# EAGLE board ESC (EAGLE 9.6.2)
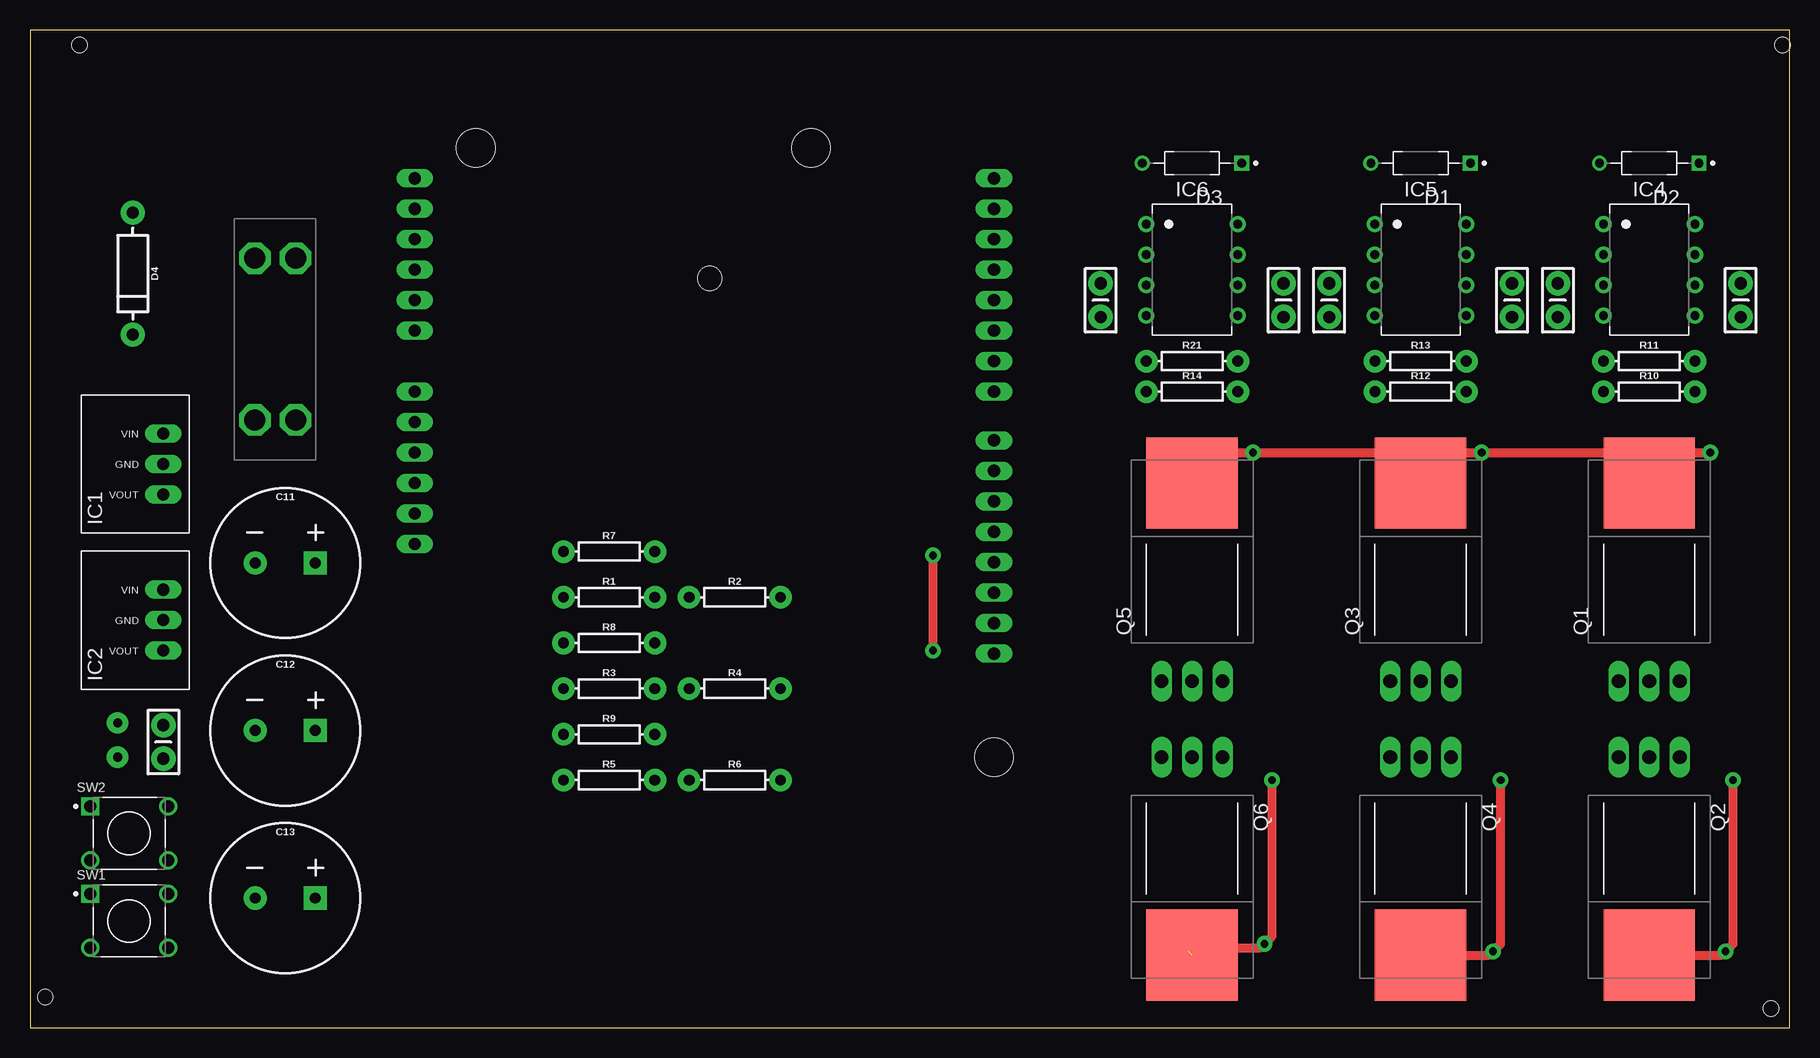
[diagram p0: board, top side]
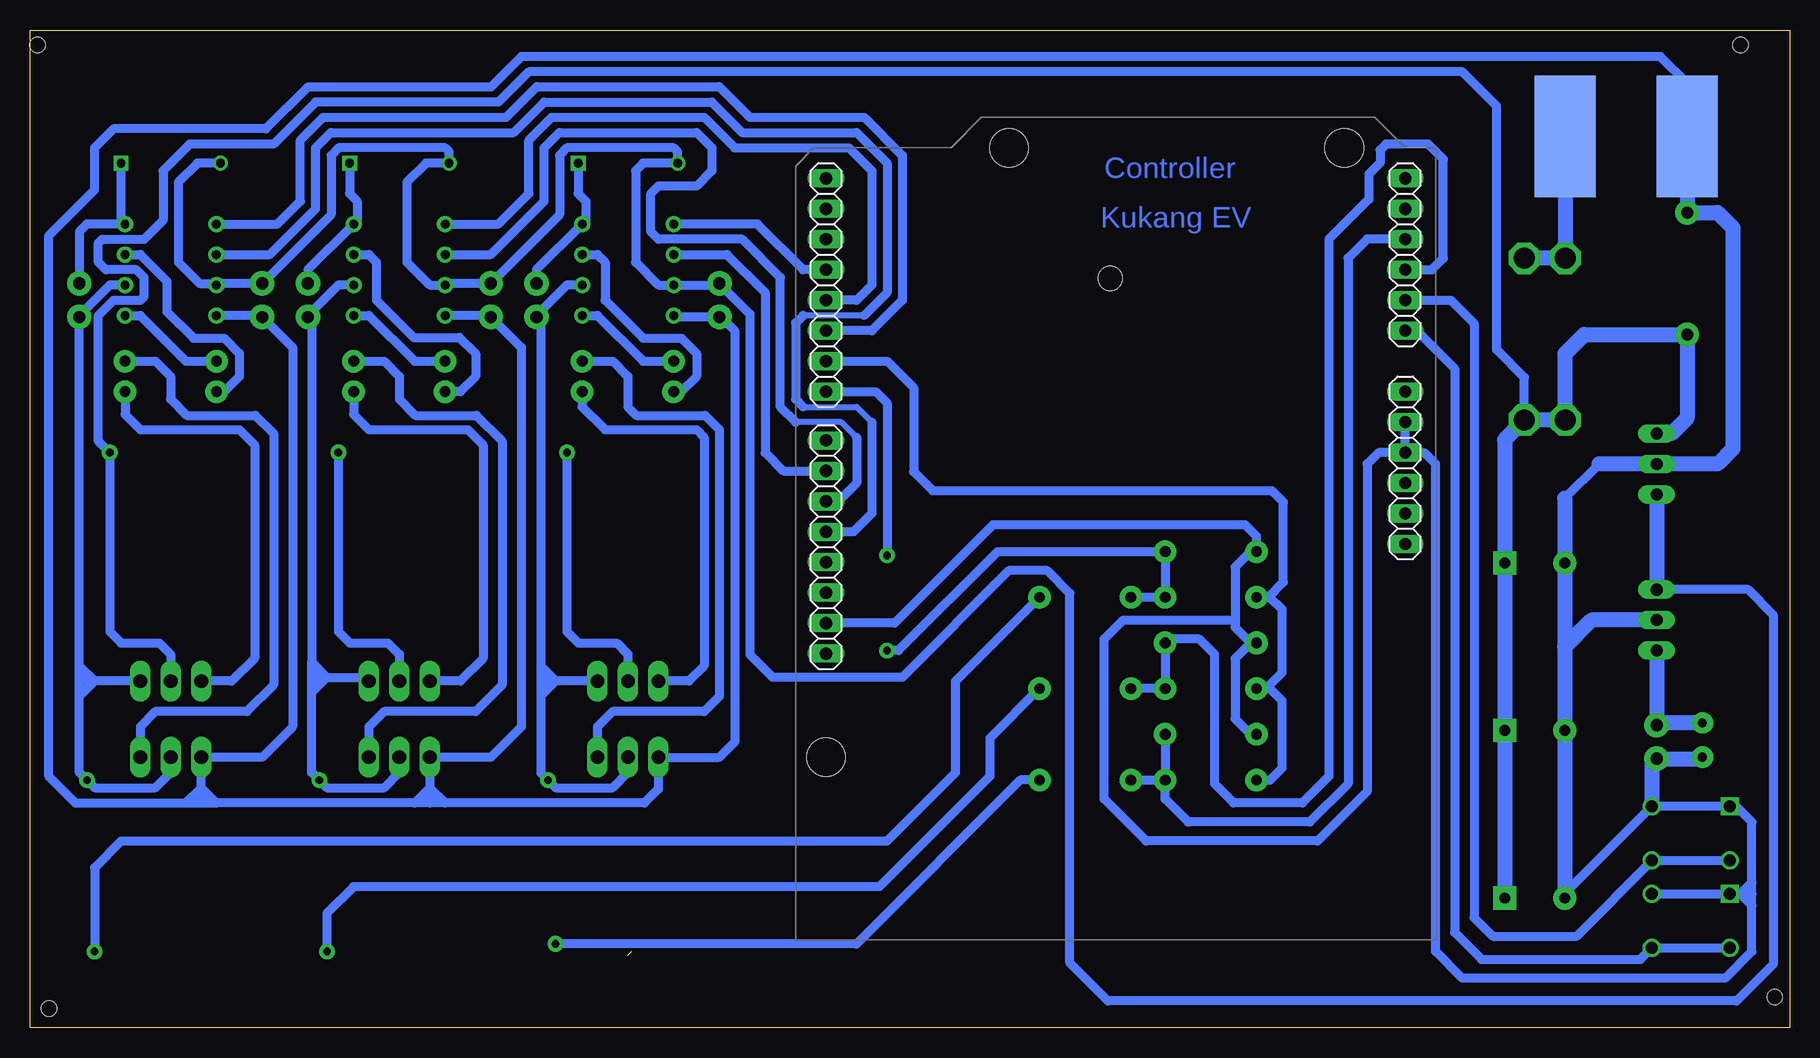
[diagram p1: board, bottom side, seen from below]

Size 146.66 x 83.17 mm. Coordinates in mm from the lower left corner, seen from the top.
Outline: 0,0 146.67,0 146.67,83.17 0,83.17 0,0
Copper layers (1*16): Top 0.035mm / dielectric 1.5mm / Bottom 0.035mm
Design rules "default": minimum track width 6mil, minimum drill 0.35mm, track to track 6mil, track to pad 6mil, pad to pad 6mil, via to via 6mil, smd to smd 6mil, copper to edge 40mil, drill to drill 6mil, minimum pad ring 10mil, minimum via ring 8mil, stop-mask expansion 4mil, vias tented up to drill 0mil, thermal gap 10mil
Holes 1.27 mm at 1.27,2.54 4.13,81.92 145.1,1.59 146.05,81.92

## Footprints (pad centres in the part's own frame; a part is rotated, then mirrored left to right if it is on the bottom)
CAP-PTH-SMALL-KIT = drill 1.016 pad 2.032: 1 -1.397,0; 2 1.397,0
CPOL-RADIAL-5MM-10MM = drill 0.9 pad 1.93 square: + 2.5,0 | drill 0.9 pad 1.93: - -2.5,0
DIOAD829W49L456D191 = drill 0.73: A 4.146,0 | drill 0.73 square: C -4.146,0
DIODE-1N4001 = drill 1 pad 1.981: A -5.08,0; C 5.08,0
V78W_BACKWARDS = drill 1.016 long: GND 0,-3.81; IN 2.54,-3.81; OUT -2.54,-3.81
ARDUINO2009 = drill 1.016 long: 1 33.02,2.54; 2 35.56,2.54; 3 38.1,2.54; 4 40.64,2.54; 5 43.18,2.54; 6 45.72,2.54; 7 50.8,2.54; 8 53.34,2.54; 9 55.88,2.54; 10 58.42,2.54; 11 60.96,2.54; 12 63.5,2.54; 13 63.5,50.8; 14 60.96,50.8; 15 58.42,50.8; 16 55.88,50.8; 17 53.34,50.8; 18 50.8,50.8; 19 48.26,50.8; 20 45.72,50.8; 21 41.656,50.8; 22 39.116,50.8; 23 36.576,50.8; 24 34.036,50.8; 25 31.496,50.8; 26 28.956,50.8; 27 26.416,50.8; 28 23.876,50.8 | hole 3.2: 15.24,50.8; 66.04,35.56; 66.04,7.62 | hole 2: 55.17,27.114
DIP762W53P254L1092H508Q8B = drill 0.743 pad 1.343: 1 -3.81,3.81; 2 -3.81,1.27; 3 -3.81,-1.27; 4 -3.81,-3.81; 5 3.81,-3.81; 6 3.81,-1.27; 7 3.81,1.27; 8 3.81,3.81
AUTO_FUSE = drill 1.75 octagon: 1A 0,3.4; 1B 0,0; 2A 13.47,3.4; 2B 13.47,0
TO-220-FLAT = drill 1.143 long: 1 -2.54,0; 2 0,0; 3 2.54,0 | smd 7.62 x 7.62: PAD 0,16.51
AXIAL-0.3 = drill 0.9 pad 1.88: P$1 -3.81,0; P$2 3.81,0
SW_1825910-6-4 = drill 0.99 square: 1 -3.25,2.25 | drill 0.99: 2 3.25,2.25; 3 -3.25,-2.25; 4 3.25,-2.25
PAD = smd 10.16 x 5.08: PAD 0,0

## Placement (x,y rotation side)
C4  1uF  [CAP-PTH-SMALL-KIT]  11.11,23.81 270 top
C5  10uF  [CAP-PTH-SMALL-KIT]  127.32,60.64 270 top
C6  2.2uF  [CAP-PTH-SMALL-KIT]  142.56,60.64 270 top
C7  10uF  [CAP-PTH-SMALL-KIT]  108.27,60.64 270 top
C8  2.2uF  [CAP-PTH-SMALL-KIT]  123.51,60.64 270 top
C9  10uF  [CAP-PTH-SMALL-KIT]  89.22,60.64 270 top
C10  2.2uF  [CAP-PTH-SMALL-KIT]  104.46,60.64 270 top
C11  470uF  [CPOL-RADIAL-5MM-10MM]  21.27,38.73 0 top
C12  470uF  [CPOL-RADIAL-5MM-10MM]  21.27,24.77 0 top
C13  470uF  [CPOL-RADIAL-5MM-10MM]  21.27,10.79 0 top
D1  1N4148  [DIOAD829W49L456D191]  115.89,72.07 180 top
D2  1N4148  [DIOAD829W49L456D191]  134.94,72.07 180 top
D3  1N4148  [DIOAD829W49L456D191]  96.84,72.07 180 top
D4  TVS  [DIODE-1N4001]  8.57,62.86 270 top
IC1  [V78W_BACKWARDS]  7.3,46.99 90 top
IC2  [V78W_BACKWARDS]  7.3,33.97 90 top
IC3  [ARDUINO2009]  29.53,7.3 90 bottom
IC4  L6387EDIP8  [DIP762W53P254L1092H508Q8B]  134.94,63.18 0 top
IC5  L6387EDIP8  [DIP762W53P254L1092H508Q8B]  115.89,63.18 0 top
IC6  L6387EDIP8  [DIP762W53P254L1092H508Q8B]  96.84,63.18 0 top
J2  FUSE  [AUTO_FUSE]  18.73,64.14 270 top
Q1  [TO-220-FLAT]  134.94,28.89 0 top
Q2  [TO-220-FLAT]  134.94,22.54 180 top
Q3  [TO-220-FLAT]  115.89,28.89 0 top
Q4  [TO-220-FLAT]  115.89,22.54 180 top
Q5  [TO-220-FLAT]  96.84,28.89 0 top
Q6  [TO-220-FLAT]  96.84,22.54 180 top
R1  33k  [AXIAL-0.3]  48.26,35.88 0 top
R2  33k  [AXIAL-0.3]  58.74,35.88 0 top
R3  33k  [AXIAL-0.3]  48.26,28.26 0 top
R4  33k  [AXIAL-0.3]  58.74,28.26 0 top
R5  33k  [AXIAL-0.3]  48.26,20.64 0 top
R6  33k  [AXIAL-0.3]  58.74,20.64 0 top
R7  10k  [AXIAL-0.3]  48.26,39.69 0 top
R8  10k  [AXIAL-0.3]  48.26,32.07 0 top
R9  10k  [AXIAL-0.3]  48.26,24.45 0 top
R10  10  [AXIAL-0.3]  134.94,53.02 0 top
R11  10  [AXIAL-0.3]  134.94,55.56 0 top
R12  10  [AXIAL-0.3]  115.89,53.02 0 top
R13  10  [AXIAL-0.3]  115.89,55.56 0 top
R14  10  [AXIAL-0.3]  96.84,53.02 0 top
R21  10  [AXIAL-0.3]  96.84,55.56 0 top
SW1  1825910-6  [SW_1825910-6-4]  8.25,8.89 0 top
SW2  1825910-6  [SW_1825910-6-4]  8.25,16.19 0 top
U$9  PAD  [PAD]  18.73,74.3 90 bottom
U$10  PAD  [PAD]  8.57,74.3 90 bottom

## Library data of the parts
C4-C10 = SparkFun-Capacitors; PROD_ID: CAP-08370
C11-C13 = SparkFun-Capacitors; PROD_ID: CAP-09538
D1-D3 = 1N4148; AVAILABILITY: In Stock; DESCRIPTION: Diode Standard 75V 200mA Surface Mount SOD-523F; MF: ON Semiconductor; MP: 1N4148; PACKAGE: AXIAL LEAD-2 ON Semiconductor; PRICE: None; PURCHASE-URL: https://pricing.snapeda.com/search?q=1N4148&ref=eda
D4 = SparkFun-DiscreteSemi; PROD_ID: DIO-09176
IC1 IC2 = 2018
IC3 = arduino
IC4-IC6 J2 Q1-Q6 U$9 U$10 = Custom_old
R1-R14 R21 = SparkFun-Resistors
SW1 SW2 = 1825910-6; AVAILABILITY: In Stock; COMMENT: 1825910-6; DESCRIPTION: Switch Push Button OFF (ON) SPST Round Button 0.05A 24VDC Momentary Contact PC Pins Thru-Hole; MF: TE Connectivity; MP: 1825910-6; PACKAGE: None; PRICE: None; PURCHASE-URL: https://pricing.snapeda.com/search?q=1825910-6&ref=eda

## Nets
5V: C4.1 IC2.OUT
+3V3: IC3.2
+5V: IC3.3
+VIN: IC3.6
BEMF_A: IC3.20 R1.P$2 R2.P$1 R7.P$2
BEMF_B: IC3.9 R3.P$2 R4.P$1 R8.P$2
BEMF_C: IC3.10 R5.P$2 R6.P$1 R9.P$2
COM_A: C6.2 IC4.6 Q1.3 Q2.2 Q2.PAD R2.P$2
COM_B: C8.2 IC5.6 Q3.3 Q4.2 Q4.PAD R4.P$2
COM_C: C10.2 IC6.6 Q5.3 Q6.2 Q6.PAD R6.P$2
CTRL_AH: IC3.24 IC4.2
CTRL_AL: IC3.18 IC4.1
CTRL_BH: IC3.23 IC5.2
CTRL_BL: IC3.17 IC5.1
CTRL_CH: IC3.22 IC6.2
CTRL_CL: IC3.16 IC6.1
DRV_AH: IC4.7 R10.P$1
DRV_AL: IC4.5 R11.P$1
DRV_BH: IC5.7 R12.P$1
DRV_BL: IC5.5 R13.P$1
DRV_CH: IC6.7 R14.P$1
DRV_CL: IC6.5 R21.P$1
GND: C4.2 C5.2 C7.2 C9.2 C11.- C12.- C13.- D4.A IC1.GND IC2.GND IC3.4 IC3.5 IC3.27 IC4.4 IC5.4 IC6.4 Q2.3 Q4.3 Q6.3 R7.P$1 R8.P$1 R9.P$1 SW1.1 SW1.2 SW2.1 SW2.2 U$10.PAD
N$1: C8.1 D1.C IC5.8
N$2: C10.1 D3.C IC6.8
N$3: Q1.1 R10.P$2
N$4: Q3.1 R12.P$2
N$5: C6.1 D2.C IC4.8
N$6: IC3.7 SW1.3 SW1.4
N$7: IC3.8 SW2.3 SW2.4
N$9: Q4.1 R13.P$2
N$10: Q5.1 R14.P$2
N$11: Q6.1 R21.P$2
N$12: Q2.1 R11.P$2
V_BEMF: IC3.19 R1.P$1 R3.P$1 R5.P$1
V_PREFUSE1: J2.1A J2.1B U$9.PAD
V_RAW: C11.+ C12.+ C13.+ D4.C IC1.IN J2.2A J2.2B Q1.2 Q1.PAD Q3.2 Q3.PAD Q5.2 Q5.PAD
VDD: C5.1 C7.1 C9.1 D1.A D2.A D3.A IC1.OUT IC2.IN IC4.3 IC5.3 IC6.3

## Tracks (layer width: path | path; a pad name or v marks a point on that pad's centre or on a via)
5V  (via drill 0.76 pad 1.78)
  Bottom 1.27: C4.1 11.43,25.21 | IC2.OUT C4.1 | v7.3,25.4 10.92,25.4 C4.1
BEMF_A  (via drill 0.65 pad 1.3)
  Top 0.762: v75.25,39.37 v75.25,31.43
  Bottom 0.762: IC3.20 76.2,53.02 75.25,52.07 v75.25,39.37 | v75.25,31.43 74.3,31.43 66.04,39.69 R7.P$2 R1.P$2 R2.P$1
BEMF_B
  Bottom 0.762: IC3.9 29.85,63.18 28.89,64.14 28.89,72.39 30.16,73.66 33.65,73.66 34.15,73.16 34.15,72.1 35.08,71.17 35.08,69.06 38.42,65.72 38.42,20.95 40.64,18.73 46.36,18.73 47.94,20.32 47.94,31.12 49.21,32.38 51.75,32.38 R8.P$2 R3.P$2 R4.P$1
BEMF_C
  Bottom 0.762: IC3.10 32.09,65.75 35.24,65.75 36.83,64.16 36.83,20.32 40.01,17.14 50.16,17.14 52.07,19.05 R5.P$2 | R9.P$2 R5.P$2 | R6.P$1 R5.P$2
COM_A  (via drill 0.65 pad 1.3)
  Top 0.762: Q2.PAD 140.97,6.03 v141.29,6.35 141.92,6.98 v141.92,20.64
  Bottom 0.762: IC4.6 140.02,61.91 142.56,59.37 C6.2 142.56,30.16 | Q1.3 141.29,28.89 | 142.56,30.16 141.29,28.89 | Q2.2 134.94,21.27 136.21,20 141.29,20 v141.92,20.64 142.56,21.27 142.56,27.62 | 142.56,27.62 142.56,28.89 | 142.56,28.89 142.56,30.16 | 141.29,28.89 142.56,27.62 | 141.29,28.89 142.56,28.89 | v141.29,6.35 141.29,13.34 139.07,15.56 75.25,15.56 69.53,21.27 69.53,28.89 R2.P$2
COM_B  (via drill 0.65 pad 1.3)
  Top 0.762: Q4.PAD 121.6,6.03 v121.92,6.35 122.56,6.98 v122.56,20.64
  Bottom 0.762: IC5.6 120.97,61.91 123.51,59.37 C8.2 123.19,58.93 123.19,30.48 | 121.92,29.21 118.75,29.21 Q3.3 | 123.19,30.48 121.92,29.21 | Q4.2 115.89,21.27 117.16,20 121.92,20 v122.56,20.64 123.19,21.27 123.19,27.94 | 123.19,27.94 123.19,29.21 | 123.19,29.21 123.19,30.48 | 121.92,29.21 123.19,27.94 | 121.92,29.21 123.19,29.21 | v121.92,6.35 121.92,9.52 119.7,11.75 75.88,11.75 66.68,20.95 66.68,24.13 R4.P$2
COM_C  (via drill 0.65 pad 1.3)  (1 unrouted)
  Top 0.762: 96.52,6.35 96.84,6.67 | Q6.PAD 97.47,6.67 102.55,6.67 v102.87,6.98 103.5,7.62 v103.5,20.64
  Bottom 0.762: Q6.2 96.84,21.27 98.11,20 102.87,20 v103.5,20.64 104.08,21.21 104.08,27.69 | 104.08,30.1 102.87,28.89 | 104.08,30.1 104.08,58.86 C10.2 104.46,59.37 101.92,61.91 IC6.6 | Q5.3 102.87,28.89 | 104.08,27.69 104.08,28.89 | 104.08,28.89 104.08,30.1 | 102.87,28.89 104.08,27.69 | 102.87,28.89 104.08,28.89 | v102.87,6.98 77.79,6.98 64.14,20.64 R6.P$2
CTRL_AH
  Bottom 0.508: 77.15,59.37 82.23,59.37 | 82.23,51.75 77.79,51.75 76.52,50.48
  Bottom 0.762: IC4.2 126.68,64.45 122.87,68.26 122.87,73.34 121.6,74.61 106.36,74.61 103.82,77.15 89.85,77.15 87.31,74.61 77.79,74.61 75.25,72.07 75.25,61.28 77.15,59.37 | 82.23,59.37 82.87,58.74 82.87,52.39 82.23,51.75 | 76.52,50.48 76.52,42.86 78.04,41.34 IC3.24
CTRL_AL
  Bottom 0.762: IC4.1 126.05,66.99 124.14,68.9 124.14,73.98 122.24,75.88 107,75.88 104.43,78.45 89.24,78.45 86.68,75.88 77.15,75.88 73.98,72.71 73.98,60.64 76.52,58.1 IC3.18
CTRL_BH
  Bottom 0.508: 82.87,50.48 79.06,50.48 77.79,49.21
  Bottom 0.762: IC5.2 108.27,64.45 103.82,68.9 103.82,73.34 102.55,74.61 91.12,74.61 89.85,73.34 89.85,71.44 91.12,70.17 94.3,70.17 94.93,69.53 94.93,66.36 94.3,65.72 87.31,65.72 84.14,62.55 84.14,51.75 82.87,50.48 | 77.79,49.21 77.79,45.4 79.31,43.88 IC3.23
CTRL_BL
  Bottom 0.762: IC3.17 77.79,60.64 76.52,61.91 76.52,71.44 78.42,73.34 87.95,73.34 90.49,75.88 103.19,75.88 105.09,73.98 105.09,69.53 107.63,66.99 IC5.1
CTRL_CH
  Bottom 0.762: IC6.2 88.58,64.45 85.41,61.28 85.41,47.94 83.88,46.42 IC3.22
CTRL_CL
  Bottom 0.762: IC3.16 82.23,63.18 86.04,66.99 IC6.1
DRV_AH
  Bottom 0.762: IC4.7 137.48,64.45 135.26,62.23 135.26,59.69 133.03,57.47 130.49,57.47 129.22,56.2 129.22,54.29 130.49,53.02 R10.P$1
DRV_AL
  Bottom 0.762: IC4.5 137.48,59.37 133.67,55.56 R11.P$1
DRV_BH
  Bottom 0.762: IC5.7 118.43,64.45 117.79,63.82 117.79,60.64 114.69,57.54 110.88,57.54 109.54,56.2 109.54,54.29 110.81,53.02 R12.P$1
DRV_BL
  Bottom 0.762: IC5.5 118.43,59.37 114.62,55.56 R13.P$1
DRV_CH
  Bottom 0.762: IC6.7 99.38,64.45 98.74,63.82 98.74,60.64 95.57,57.47 92.39,57.47 91.12,56.2 91.12,54.29 92.39,53.02 R14.P$1
DRV_CL
  Bottom 0.762: IC6.5 99.38,59.37 95.57,55.56 R21.P$1
GND  (via drill 0.76 pad 1.78)
  Bottom 0.762: IC6.4 92.9,59.25 C9.2 89.09,59.25 87.95,58.1 87.95,23.81 89.22,22.54 Q6.3 94.3,19.9 95.46,18.73 112.08,18.73 | IC5.4 108.39,59.37 C7.2 105.73,56.71 105.73,25.08 108.27,22.54 Q4.3 113.35,20 | IC4.4 127.44,59.37 C5.2 124.78,56.71 124.78,25.08 127.32,22.54 Q2.3 132.4,20 | 114.62,18.73 113.35,20 | 114.62,18.73 131.13,18.73 | 131.13,18.73 132.4,20 | 112.08,18.73 113.35,18.73 | 113.35,18.73 114.62,18.73 | 113.35,20 112.08,18.73 | 113.35,20 113.35,18.73 | IC3.27 74.61,33.72 66.42,41.91 45.4,41.91 44.45,40.96 R7.P$1 44.95,39.69 46.24,38.39 46.24,33.97 | 133.67,18.73 142.88,18.73 145.1,20.95 145.1,66.04 141.29,69.85 141.29,73.34 139.7,74.93 127,74.93 123.51,78.42 108.27,78.42 105.73,80.96 10.8,80.96 8.57,78.74 U$10.PAD | 133.67,18.73 132.4,18.73 | 132.4,18.73 131.13,18.73 | 132.4,20 133.67,18.73 | 132.4,20 132.4,18.73 | 46.24,33.97 46.24,33.36 44.95,32.07 | R8.P$1 44.95,32.07 | 44.95,32.07 46.24,30.77 46.24,25.74 44.95,24.45 R9.P$1 | 15.91,46.99 18.77,44.13 | IC3.4 34.29,47.94 35.24,46.99 35.24,19.69 39.37,15.56 53.66,15.56 57.15,19.05 57.15,32.38 55.56,33.97 46.24,33.97 | IC3.4 IC3.5 | IC3.4 30.48,47.94 29.53,46.99 29.53,6.35 27.31,4.13 5.4,4.13 3.18,6.35 3.18,10.19 | 3.18,10.19 3.18,11.11 | 3.18,11.11 3.18,12.09 | 3.18,12.09 3.18,17.14 4.47,18.44 SW2.1 SW2.2 18.77,11.18 C13.- 18.77,12.38 | SW1.2 SW1.1 4.13,11.14 | 4.13,11.14 3.2,11.14 3.18,11.11 | 4.13,11.14 3.18,12.09 | 4.13,11.14 3.18,10.19
  Bottom 1.27: U$10.PAD D4.A 6.03,67.94 4.76,66.67 4.76,48.26 6.03,46.99 IC1.GND 15.91,46.99 | 18.77,44.13 C11.- C12.- | IC2.GND 16.55,33.97 18.77,31.75 C12.- | C12.- C13.- | v7.3,22.54 7.43,22.42 C4.2 11.51,22.02 SW2.2
N$1
  Bottom 0.762: D1.C 120.03,69.53 119.4,68.9 119.4,67.29 IC5.8 123.51,63.18 C8.1
N$2
  Bottom 0.762: D3.C 100.98,69.53 100.35,68.9 100.35,67.29 IC6.8 104.46,63.18 C10.1
N$3
  Bottom 0.762: R10.P$2 138.75,51.12 137.48,49.85 129.22,49.85 127.95,48.58 127.95,30.8 129.86,28.89 Q1.1
N$4
  Bottom 0.762: R12.P$2 119.7,51.12 118.43,49.85 110.17,49.85 108.9,48.58 108.9,30.8 110.81,28.89 Q3.1
N$5
  Bottom 0.762: D2.C 139.08,67.33 IC4.8 141.92,66.99 142.56,66.36 C6.1
N$6
  Bottom 0.762: IC3.7 31.12,58.1 27.94,54.93 27.94,7.94 25.69,5.69 12.46,5.69 SW1.4 SW1.3
N$7
  Bottom 0.762: IC3.8 28.26,60.64 26.31,58.7 26.31,9.17 24.76,7.62 17.78,7.62 11.51,13.9 SW2.4 SW2.3
N$9
  Bottom 0.762: R13.P$2 117.16,55.56 115.89,54.29 115.89,52.39 114.54,51.04 109.46,51.04 107.31,48.89 107.31,28.58 109.54,26.35 117.16,26.35 118.43,25.08 Q4.1
N$10
  Bottom 0.762: R14.P$2 100.65,51.75 98.74,49.85 91.12,49.85 90.49,49.21 90.49,30.16 91.76,28.89 Q5.1
N$11
  Bottom 0.762: R21.P$2 98.11,55.56 96.84,54.29 96.84,51.75 96.13,51.04 90.41,51.04 89.22,49.85 89.22,27.62 90.49,26.35 98.11,26.35 99.38,25.08 Q6.1
N$12
  Bottom 0.762: R11.P$2 136.21,55.56 134.94,54.29 134.94,52.39 133.59,51.04 127.88,51.04 126.36,49.53 126.36,28.58 128.59,26.35 136.21,26.35 137.48,25.08 Q2.1
V_BEMF
  Bottom 0.762: R5.P$1 43.32,20.64 42.34,21.61 42.34,27.26 43.34,28.26 R3.P$1 43.65,28.26 42.34,29.57 42.34,34.88 43.34,35.88 R1.P$1 43.5,35.88 42.23,37.15 42.23,43.81 43.18,44.77 71.44,44.77 73.03,46.35 73.03,53.34 75.25,55.56 IC3.19
V_PREFUSE1
  Bottom 1.27: U$9.PAD J2.1B J2.1A
V_RAW  (via drill 0.65 pad 1.3)
  Top 0.762: Q5.PAD 99.38,47.94 v101.92,47.94 v120.97,47.94 | Q3.PAD 118.43,47.94 v120.97,47.94 | Q1.PAD 137.48,47.94 v140.02,47.94 v120.97,47.94
  Bottom 0.762: v101.92,47.94 101.92,33.02 100.97,32.07 97.79,32.07 96.84,31.12 Q5.2 | v120.97,47.94 120.97,33.02 120.01,32.07 116.84,32.07 115.89,31.12 Q3.2 | Q1.2 134.94,31.12 135.89,32.07 139.07,32.07 140.02,33.02 v140.02,47.94 140.97,48.89 140.97,59.37 139.7,60.64 137.48,60.64 137.16,60.96 137.16,62.55 137.8,63.18 140.33,63.18 140.97,63.82 140.97,65.41 140.65,65.72 137.16,65.72 135.57,67.31 135.57,71.44 133.35,73.66 126.36,73.66 122.87,77.15 107.63,77.15 105.09,79.69 27.31,79.69 24.45,76.83 24.45,56.52 22.13,54.2 J2.2A
  Bottom 1.27: IC1.IN 9.84,49.53 8.57,50.8 D4.C 17.14,57.78 18.73,56.2 J2.2B J2.2A 23.77,49.03 C11.+ C12.+ C13.+
VDD
  Bottom 0.762: 131,62.04 C5.1 121.58,67.78 121.58,72.71 120.94,73.34 112.08,73.34 111.74,73.01 D1.A 113.65,72.07 115.25,70.47 115.25,63.82 113.35,61.91 IC5.3 111.95,62.04 C7.1 102.53,67.78 102.53,72.73 101.92,73.34 93.03,73.34 92.69,73.01 D3.A 95.57,72.07 96.2,71.44 96.2,63.82 94.3,61.91 IC6.3 89.34,61.91 C9.1 86.68,59.5 86.68,31.12 84.77,29.21 73.98,29.21 65.09,38.1 61.91,38.1 60.01,36.2 60.01,5.4 56.83,2.22 4.44,2.22 1.4,5.27 1.4,34.42 3.49,36.51 IC2.IN | 131,62.04 IC4.3 | D2.A 132.7,72.07 134.3,70.47 134.3,63.82 132.52,62.04 131,62.04
  Bottom 1.27: IC1.OUT IC2.IN

## Text on the board
Bottom: Controller | Kukang EV